# Altium PCB POWER_2layer.PcbDoc (part 1 of 2)
Units mm, origin at the board's own origin, x right, y up, seen from the top; angles counter-clockwise.
Board outline 130 x 60 mm, 2 copper layers (Top Layer, Bottom Layer), stack 1.571 mm thick; 93 components, 51 nets, 347 pads, 515 vias.
Unrouted connection lines stored in the file: 102.
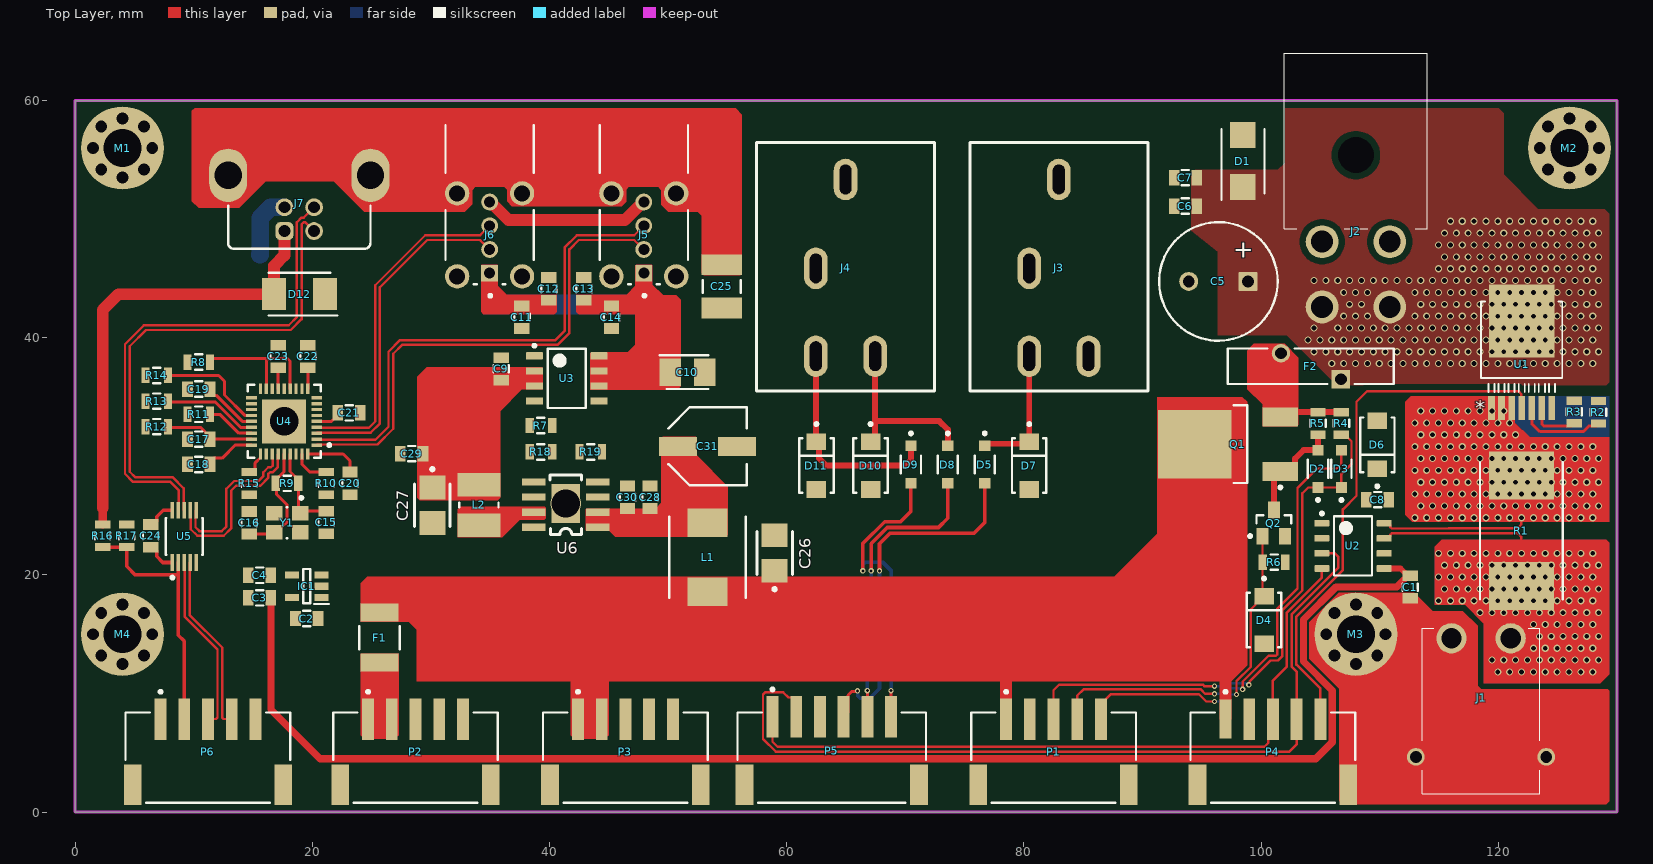
[diagram p0: Top Layer view]
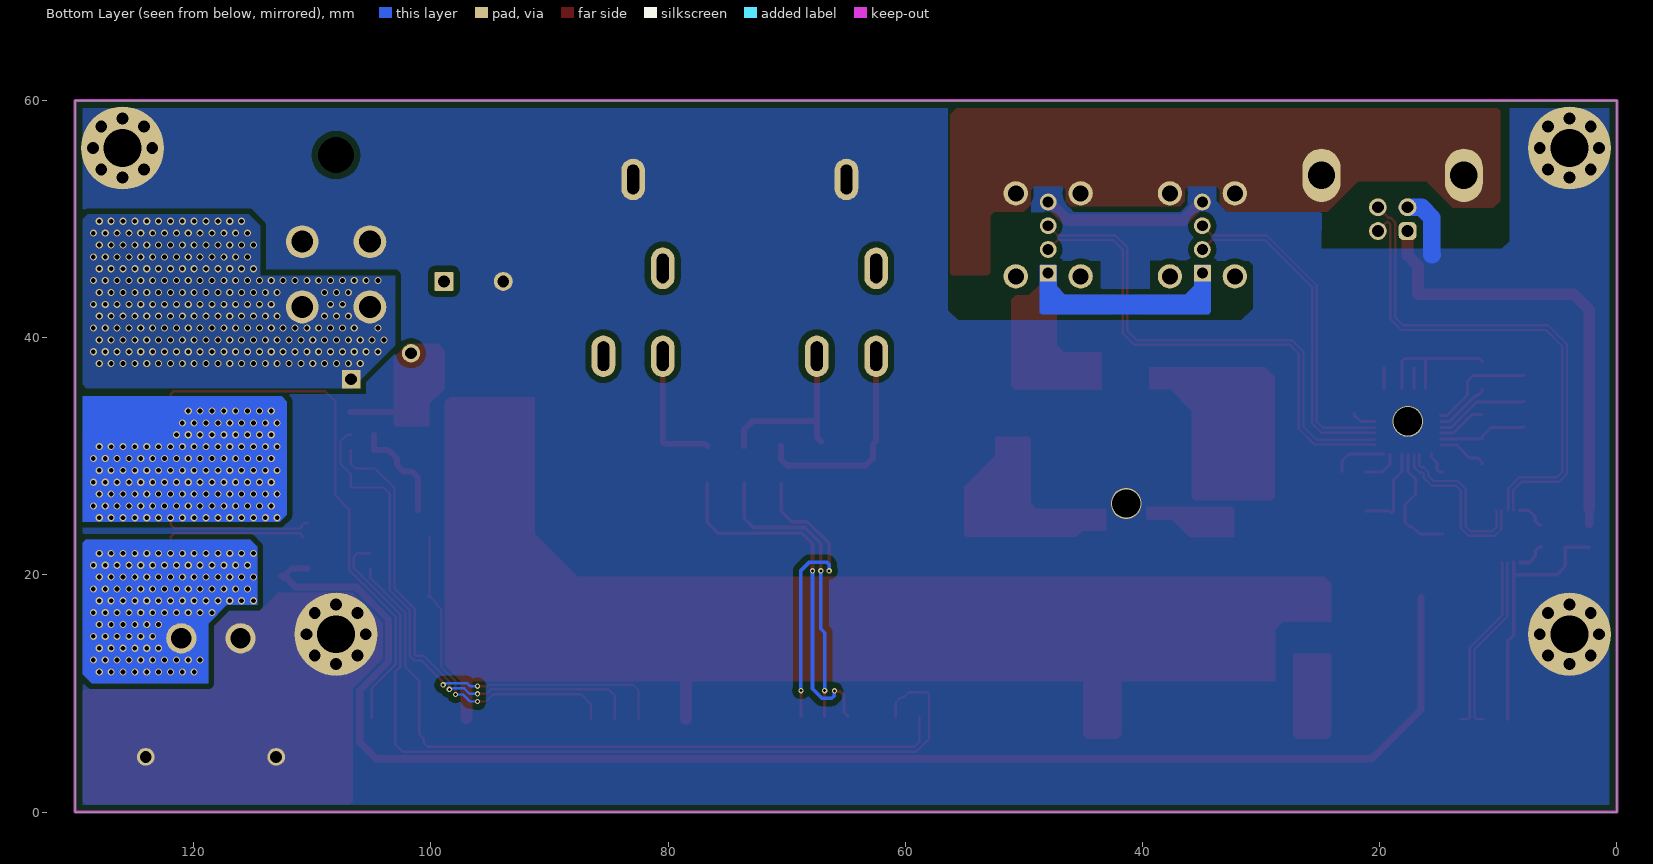
[diagram p1: Bottom Layer view, seen from below]
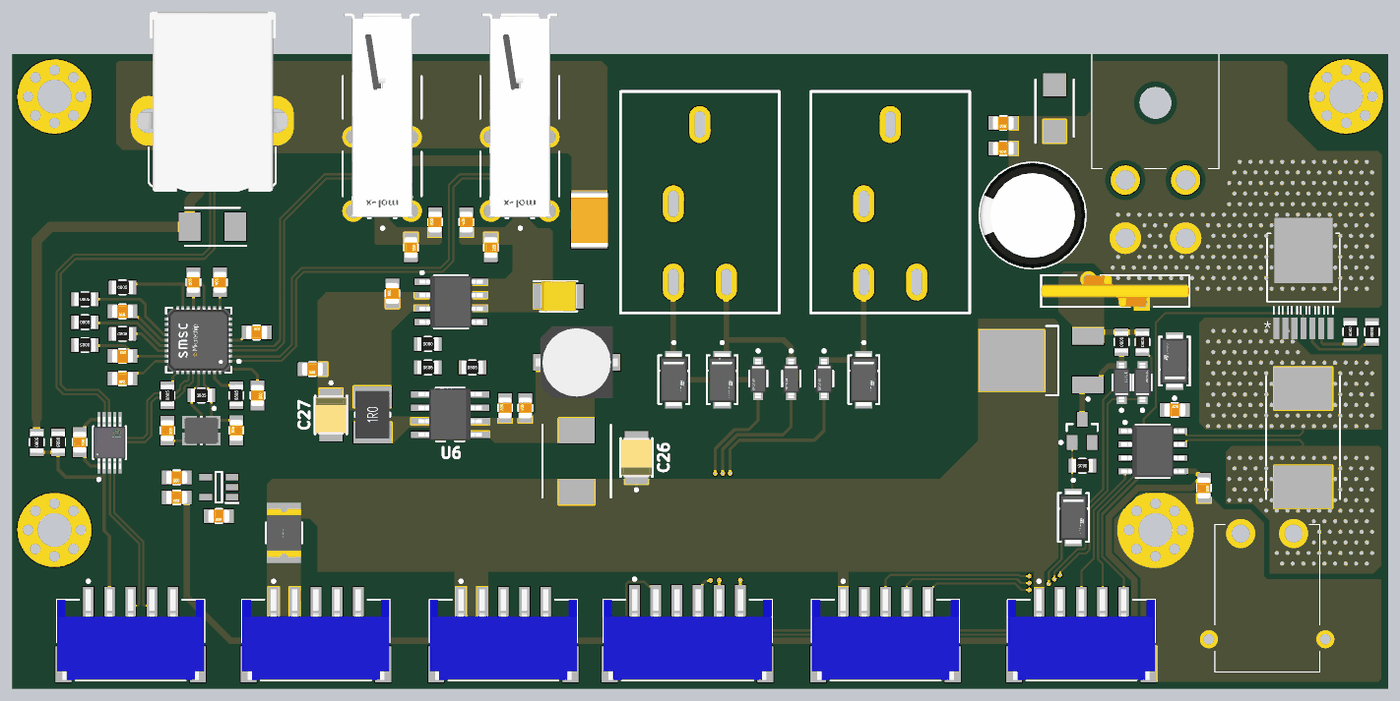
[diagram p2: 3D render of the assembled board from above, using the file's embedded part models]

## Layer stack, top to bottom
Top Solder: solder mask 0.0102, Solder Resist, Dk 3.5
Top Layer: signal copper 0.0356
Dielectric 1: dielectric 1.5, FR-4, Dk 4.8
Bottom Layer: signal copper 0.0356
Bottom Solder: solder mask 0.0102, Solder Resist, Dk 3.5

## Board outline
0,0 0,60 130,60 130,0

## Design rules (kind name [scope] priority, off if disabled: settings)
Clearance Clearance_Poly [InPoly] p1: gap=0.5 ignorepadtopadclearanceinfootprint=FALSE
Clearance [All] p2: gap=0.2 ignorepadtopadclearanceinfootprint=FALSE
DiffPairsRouting [All] p1: maxlimit=0.254 minlimit=0.2 mostfreqgap=0.2 toplayer_minwidth=0.2 toplayer_maxwidth=0.2 toplayer_prefwidth=0.2 bottomlayer_minwidth=0.2 bottomlayer_maxwidth=0.2 bottomlayer_prefwidth=0.2 maxuncoupledlength=12.7
HoleSize [All] p1: absolutevalues=TRUE maxlimit=10 minlimit=0.025 maxpercent=80.000 minpercent=20.000
PolygonConnect [All] p1: connectstyle=Direct reliefconductorwidth=0.254 reliefentries=4 polygonreliefangle="90 Angle" airgapwidth=0.254
RoutingVias [All] p1: holewidth=0.711 width=1.27 viastyle="Through Hole" minholewidth=0.25 minwidth=0.45 maxholewidth=0.711 maxwidth=1.27
SolderMaskExpansion [All] p1: expansion=0.102 istentingtop=FALSE
Width [All] p1: maxlimit=5 minlimit=0.2 preferedwidth=0.2
28 further rules are at their usual default settings.

## Classes and differential pairs
component class USB: C9 C10 C11 C12 C13 C14 C15 C16 C17 C26 C27 C28 C29 C30 C31 D12 J5 J6 J7 L1 L2 P6 R7 R8 R9 R10 R11 R12 R13 R14 R15 R16 R17 R18 R19 U3 U4 U5 U6 Y1
component class POWER: C1 C2 C3 C4 C5 C6 C7 C8 D1 D2 D3 D4 D5 D6 D7 D8 D9 D10 D11 F1 F2 IC1 J1 J2 J3 J4 M1 M2 M3 M4 P1 P2 P3 P4 P5 Q1 Q2 R1 R2 R3 R4 R5 R6 U1 U2
differential pair USB: +USB_P -USB_N
differential pair USBH: +USBH_P -USBH_N
differential pair USBH2: +USBH2_P -USBH2_N
differential pair USBH1: +USBH1_P -USBH1_N
differential pair USBD: +USBD_P -USBD_N
differential pair PA_CUR: +PA_CUR_P -PA_CUR_N

## Components (designator, comment, footprint, x,y, rotation, side; value= is the part's Value field where it differs from the comment)
C1 "100nF" C-0805 112.575,18.975 r270 top
C2 "100nF" C-0805 19.525,16.325 r180 top
C3 "10uF" C-0805 15.55,18.075 r180 top
C4 "100nF" C-0805 15.55,19.975 r180 top
C5 "330uF" "CE 5.0-10x12.5" 96.4,44.75 r180 top
C6 "100nF" C-0805 93.625,51.1 r180 top
C7 "10nF" C-0805 93.625,53.5 r180 top
C8 "8.2n" C-0805 109.825,26.35 r0 top
C9 "10uF" C-0805 35.925,37.375 r90 top
C10 "TAJB107K006RNJ" CAPPM3528X210N 51.625,37.1 r0 top
C11 "10uF" C-0805 37.675,41.725 r270 top
C12 "10uF" C-0805 39.95,44.125 r90 top
C13 "10uF" C-0805 42.9,44.125 r90 top
C14 "10uF" C-0805 45.225,41.725 r270 top
C15 "18pF NP0" C-0805 21.175,24.425 r90 top
C16 "18pF NP0" C-0805 14.675,24.4 r270 top
C17 "100n" C-0805 10.425,31.45 r0 top
C18 "100nF" C-0805 10.425,29.325 r180 top
C19 "100nF" C-0805 10.425,35.675 r180 top
C20 "100nF" C-0805 23.175,27.725 r270 top
C21 "100nF" C-0805 23.1,33.675 r0 top
C22 "100nF" C-0805 19.625,38.425 r90 top
C23 "100nF" C-0805 17.125,38.425 r90 top
C24 "100n" C-0805 6.375,23.3 r270 top
C25 "1812B103K202CT" CAPC4632X280X75LL50T35 54.525,44.325 r270 top
C26 "10uF 20V" CAPAE_4.3X4.3H5.4 58.975,21.45 r90 top
C27 "22uF 10V" CAPAE_4.3X4.3H5.4 30.125,26.275 r270 top
C28 "100nF" C-0805 48.475,26.55 r90 top
C29 "100nF" C-0805 28.375,30.225 r180 top
C30 "100nF" C-0805 46.575,26.55 r90 top
C31 "EEE1EA220SP" EEE1AA101SP 53.325,30.85 r0 top
D1 "SM6T15A-E3_52" DIOM5436X244N 98.475,54.9 r90 top
D2 "1N4148W-13-F" FP-SOD123-MFG 104.8,28.95 r90 top value=2pF
D3 "1N4148W-13-F" FP-SOD123-MFG 106.775,28.95 r90 top value=2pF
D4 "SMAJ5.0A-TR" FP-SMA-MFG 100.25,16.2 r270 top
D5 "1N4148W-13-F" FP-SOD123-MFG 76.7,29.313 r270 top value=2pF
D6 "SMAJ5.0A-TR" FP-SMA-MFG 109.8,30.975 r90 top
D7 "SMAJ5.0A-TR" FP-SMA-MFG 80.45,29.221 r270 top
D8 "1N4148W-13-F" FP-SOD123-MFG 73.587,29.313 r270 top value=2pF
D9 "1N4148W-13-F" FP-SOD123-MFG 70.475,29.313 r270 top value=2pF
D10 "SMAJ5.0A-TR" FP-SMA-MFG 67.074,29.221 r270 top
D11 "SMAJ5.0A-TR" FP-SMA-MFG 62.502,29.221 r270 top
D12 "SK14B" DIOM5236X261N 18.925,43.675 r180 top
F1 "MF-MSMF110/16-2" FP-MF-MSMF110-16-MFG 25.675,14.725 r270 top value=0.04-0.21Ω
F2 "RUEF400" FP-RUEF400-MFG 104.2,37.6 r180 top value=0.01-0.05Ω
IC1 "TPS70933DBVR" SOT95P280X145-5N 19.525,19.05 r180 top
J1 "XT30PW-M" XT30PWM 118.55,8.75 r180 top
J2 "76825-0004" 768250004 108,53.3 r180 top locked
J3 "PJ-603A" PJ-603A 82.95,45.9 r0 top locked
J4 "PJ-603A" PJ-603A 64.96,45.9 r0 top locked
J5 "48204-0001" FP-48204-0001-MFG 47.95,54.25 r180 top locked
J6 "48204-0001" FP-48204-0001-MFG 34.95,54.25 r180 top locked
J7 "USB B-PCB-R" USB_B_PCB_R 18.9,51.35 r180 top
L1 "IHLP2525CZER100M01" INDPM6965X300N 53.325,21.5 r90 top
L2 "744045003" WE-LQ-L 34.05,25.9 r90 top
M1 "MountHole" MOUNTHOLE 4,56 r90 top locked
M2 "MountHole" MOUNTHOLE 126,56 r90 top locked
M3 "MountHole" MOUNTHOLE 108,15 r90 top
M4 "MountHole" MOUNTHOLE 4,15 r90 top locked
P1 "S5B-PH-SM4-TB(LF)(SN)" JST-S5B-PH-SM4-TB_V#1 82.5,5.175 r0 top
P2 "S5B-PH-SM4-TB(LF)(SN)" JST-S5B-PH-SM4-TB_V#1 28.7,5.175 r0 top
P3 "S5B-PH-SM4-TB(LF)(SN)" JST-S5B-PH-SM4-TB_V#1 46.4,5.175 r0 top
P4 "S5B-PH-SM4-TB(LF)(SN)" JST-S5B-PH-SM4-TB_V#2 101,5.175 r0 top
P5 "S6B-PH-SM4-TB(LF)(SN)" JST-S6B-PH-SM4-TB(LF)(SN)_V 63.8,5.175 r0 top
P6 "S5B-PH-SM4-TB(LF)(SN)" JST-S5B-PH-SM4-TB_V#1 11.2,5.175 r0 top
Q1 "IRFR9024NPBF" ONSC-DPAK-3-369C-01_V 97.225,31.025 r180 top
Q2 "BSS123" FAIR-SOT23-3_V 101.075,24.375 r0 top
R1 "WSR22L000FEB" RESM11670X254N 121.95,23.725 r270 top
R2 "1k" R-0805 128.45,33.725 r270 top
R3 "15k" R-0805 126.4,33.75 r270 top
R4 "30k" R-0805 106.775,32.775 r90 top
R5 "30k" R-0805 104.8,32.775 r90 top
R6 "30k" R-0805 101.1,21.075 r180 top
R7 "10k" R-0805 39.275,32.6 r180 top
R8 "10k" R-0805 10.425,37.95 r0 top
R9 "1M" R-0805 17.875,27.725 r0 top
R10 "2k" R-0805 21.175,27.725 r90 top
R11 "2k" R-0805 10.425,33.55 r0 top
R12 "2k" R-0805 6.875,32.5 r180 top
R13 "2k" R-0805 6.875,34.65 r0 top
R14 "2k" R-0805 6.875,36.825 r0 top
R15 "2k" R-0805 14.675,27.725 r90 top
R16 "2k" R-0805 2.325,23.3 r90 top
R17 "2k" R-0805 4.35,23.3 r270 top
R18 "39k" R-0805 39.275,30.375 r0 top
R19 "7.5k" R-0805 43.475,30.375 r0 top
U1 "VN7004CLH" OCTAPAK7_6P1X6P5_STM-M 121.975,39.825 r0 top
U2 "INA219AIDR" D0008A_L 107.75,22.45 r0 top
U3 "TPS2034D" D0008A_N 41.45,36.575 r0 top
U4 "USB2512BI-AEZG" FP-USB2512BI-AEZG-MFG 17.625,32.95 r180 top
U5 "FSUSB42MUX" FP-846AP-MFG 9.2,23.25 r90 top
U6 "ST1S10" ST1S10 41.375,25.925 r180 top
Y1 "NX1612SA-24MHZ-STD-CIS-1" FP-NX3225GA-MFG 17.875,24.4 r180 top

## Footprints (in the part's own frame and the unit in brackets; to place one, negate y for a bottom-side part, rotate by r counter-clockwise, add the part's x,y. Pads: shape width x height; smd on the part's side, far side on the other; paste and mask are expansions set on the pad)
768250004 [mm]
  round 2.775 hole 1.85: 1(-2.85,10.7) 2(2.85,10.7) 3(-2.85,5.2) 4(2.85,5.2)
  round 1.525 hole 3.05 unplated: 5(0,-2.1)
  silkscreen extent -6,-10.7 6.02,4.1, body extent -5.99,-10.59 6.07,11.37, height 14.51
C-0805 [mm] "Surface-Mount Multilayer Chip Capacitor, Body 2 x 1.25 mm (L x W)"
  rect 0.9x1.3 smd: 1(-0.95,0) 2(0.95,0)
  Top Layer pour cut-out: -0.5,0.65 0.5,0.65 0.5,-0.65 -0.5,-0.65
  silkscreen extent -0.3,-0.65 0.3,0.65, body extent -1,-0.62 1,0.63, height 0.78
CAPAE_4.3X4.3H5.4 [mm]
  rect 2x2.2 smd: 1(-1.1,0) 2(1.9,0)
  silkscreen extent -2.9,-1.5 2.2,1.5, body extent -1.45,-1.5 2.25,1.5, height 2.16
CAPC4632X280X75LL50T35 [mm] "Chip Capacitor, 2-Leads, Body 5.1x3.5mm, IPC High Density"
  rect 1.75x3.4 smd: 1(-1.825,0) 2(1.825,0)
  silkscreen extent -0.55,-1.6 0.55,1.6, body extent -2.55,-1.75 2.55,1.75, height 2.8
CAPPM3528X210N [mm]
  rect 1.8x2.3 smd: 1(-1.45,0) 2(1.45,0)
  silkscreen extent -2.35,-1.43 1.75,1.43, body extent -1.75,-1.43 1.75,1.43, height 2.1
"CE 5.0-10x12.5" [mm] "Capacitor, Electrolytic, Radial; RM 5mm; Body 10x12.5mm"
  rrect10% 1.6x1.6 hole 1: 1(-2.5,0)
  round 1.6 hole 1: 2(2.5,0)
  silkscreen extent -5,-5 5,5, body extent -5,-5 4.97,5, height 12.51
D0008A_L [mm] "SOIC, 8-Leads, Body 5x4mm, Pitch 1.27mm, IPC High Density"
  rrect18% 1.25x0.55 smd: 1(-2.625,1.905) 2(-2.625,0.635) 3(-2.625,-0.635) 4(-2.625,-1.905) 5(2.625,-1.905) 6(2.625,-0.635) 7(2.625,0.635) 8(2.625,1.905)
  silkscreen extent -2.75,-2.5 1.6,2.85, body extent -3,-2.45 3,2.45, height 1.63
D0008A_N [mm] "SOIC, 8-Leads, Body 5x4mm, Pitch 1.27mm, IPC Medium Density"
  rrect17% 1.45x0.6 smd: 1(-2.725,1.905) 2(-2.725,0.635) 3(-2.725,-0.635) 4(-2.725,-1.905) 5(2.725,-1.905) 6(2.725,-0.635) 7(2.725,0.635) 8(2.725,1.905)
  silkscreen extent -2.85,-2.5 1.6,2.88, body extent -3,-2.45 3,2.45, height 1.63
DIOM5236X261N [mm]
  rect 2.05x2.7 smd: 1(-2.15,0) 2(2.15,0)
  silkscreen extent -3.18,-1.8 2.59,1.8, body extent -2.59,-1.8 2.59,1.8, height 2.61
DIOM5436X244N [mm]
  rect 2.2x2.15 smd: 1(-2.2,0) 2(2.2,0)
  silkscreen extent -3.27,-1.81 2.7,1.81, body extent -2.7,-1.81 2.7,1.81, height 2.44
EEE1AA101SP [mm]
  rect 3.2x1.6 smd: 1(-2.5,0) 2(2.5,0)
  silkscreen extent -3.3,-3.3 3.3,3.3, body extent -3.9,-3.4 3.9,3.4, height 5.57
FAIR-SOT23-3_V [mm] "SOT23, 3-Leads, Body 2.92x1.3mm, Pitch 0.95mm"
  rect 1x1.4 smd: 1(-0.95,-1.1) 2(0.95,-1.1) 3(0,1.1)
  silkscreen extent -2.12,-1.22 1.46,0.65, body extent -1.46,-0.65 1.46,0.65, height 1.2
FP-846AP-MFG [mm]
  rect 1.4x0.3 smd paste+0 mask+0: 1(-2.2,1) 2(-2.2,0.5) 3(-2.2,0) 4(-2.2,-0.5) 5(-2.2,-1) 6(2.2,-1) 7(2.2,-0.5) 8(2.2,0) 9(2.2,0.5) 10(2.2,1)
  silkscreen extent -3.6,-1.55 1.55,1.55, body extent -3,-1.65 3,1.65, height 0.25
FP-48204-0001-MFG [mm]
  rect 1.42x1.42 hole 0.92 paste-1000 mask+0: 1(0,8.805)
  round 1.42 hole 0.92 paste-1000 mask+0: 2(0,6.805) 3(0,4.805) 4(0,2.805)
  round 2.05 hole 1.35 paste-1000 mask+0: 5(-2.735,9.075) 6(2.735,9.075) 7(-2.735,2.075) 8(2.735,2.075)
  silkscreen extent -3.72,-3.67 3.72,10.83, body extent -3.86,-9.85 3.86,10.2, height 0.25
FP-MF-MSMF110-16-MFG [mm]
  rect 1.5x3.2 smd paste+0 mask+0: 1(-2.1,0) 2(2.1,0)
  silkscreen extent -0.97,-1.71 0.97,1.71, body extent -2.95,-1.81 2.95,1.81, height 0.25
FP-NX3225GA-MFG [mm]
  rect 1.4x1.2 smd paste+0 mask+0: 1(-1.1,-0.8) 2(1.1,-0.8) 3(1.1,0.8) 4(-1.1,0.8)
  silkscreen extent -1.33,-2.22 0.03,1.3, body extent -1.9,-1.5 1.9,1.5, height 0.25
FP-RUEF400-MFG [mm]
  rect 1.55x1.55 hole 1 paste-1000 mask+0: 1(-2.525,1.095)
  round 1.55 hole 1 paste-1000 mask+0: 2(2.525,-1.095)
  silkscreen extent -7,-1.5 7,1.5, body extent -7.1,-1.97 7.1,1.97, height 0.25
FP-SMA-MFG [mm]
  rect 1.4x1.64 smd paste+0 mask+0: 1(-2.015,0) 2(2.015,0)
  silkscreen extent -3.62,-1.45 2.3,1.45, body extent -2.82,-1.55 2.82,1.55, height 0.25
FP-SOD123-MFG [mm]
  rect 0.9x0.95 smd paste+0 mask+0: 1(-1.575,0) 2(1.575,0)
  silkscreen extent -2.75,-0.85 0.75,0.85, body extent -2.12,-0.95 2.12,0.95, height 0.25
FP-USB2512BI-AEZG-MFG [mm]
  rect 0.9x0.28 smd paste+0 mask+0: 1(-2.75,2) 2(-2.75,1.5) 3(-2.75,1) 4(-2.75,0.5) 5(-2.75,0) 6(-2.75,-0.5) 7(-2.75,-1) 8(-2.75,-1.5) 9(-2.75,-2) 19(2.75,-2) 20(2.75,-1.5) 21(2.75,-1) 22(2.75,-0.5) 23(2.75,0) 24(2.75,0.5) 25(2.75,1) 26(2.75,1.5) 27(2.75,2)
  rect 0.28x0.9 smd paste+0 mask+0: 10(-2,-2.75) 11(-1.5,-2.75) 12(-1,-2.75) 13(-0.5,-2.75) 14(0,-2.75) 15(0.5,-2.75) 16(1,-2.75) 17(1.5,-2.75) 18(2,-2.75) 28(2,2.75) 29(1.5,2.75) 30(1,2.75) 31(0.5,2.75) 32(0,2.75) 33(-0.5,2.75) 34(-1,2.75) 35(-1.5,2.75) 36(-2,2.75)
  rect 3.7x3.7 smd paste+0 mask+0: 37(0,0)
  silkscreen extent -3.93,-3.08 3.08,3.08, body extent -3.3,-3.3 3.3,3.3, height 0.25
INDPM6965X300N [mm]
  rect 2.4x3.4 smd: 1(-2.9,0) 2(2.9,0)
  silkscreen extent -3.43,-3.23 3.43,3.23, body extent -3.54,-3.33 3.53,3.34, height 2.89
JST-S5B-PH-SM4-TB_V#1 [mm] "SMD, 7-Leads, Body 13.9x7.6mm, Pitch 2mm"
  rect 1x3.5 smd: 1(-4,2.675) 2(-2,2.675) 3(0,2.675) 4(2,2.675) 5(4,2.675)
  rect 1.5x3.4 smd: MP1(-6.35,-2.875) MP2(6.35,-2.875)
  silkscreen extent -6.95,-4.38 6.95,5.1, body extent -6.95,-4.37 6.95,4.23, height 5.6
JST-S5B-PH-SM4-TB_V#2 [mm] "SMD, 7-Leads, Body 13.9x7.6mm, Pitch 2mm"
  rect 1x3.3 smd: 1(-4,2.675)
  rect 1x3.5 smd: 2(-2,2.675) 3(0,2.675) 4(2,2.675) 5(4,2.675)
  rect 1.5x3.4 smd: MP1(-6.35,-2.875) MP2(6.35,-2.875)
  silkscreen extent -6.95,-4.38 6.95,5.1, body extent -6.95,-4.37 6.95,4.23, height 5.6
JST-S6B-PH-SM4-TB(LF)(SN)_V [mm] "SMD, 2-Leads, Body 15.9x7.6mm, Pitch 2mm"
  rect 1x3.5 smd: 1(-5,2.875) 2(-3,2.875) 3(-1,2.875) 4(1,2.875) 5(3,2.875) 6(5,2.875)
  rect 1.5x3.4 smd: MP1(-7.35,-2.875) MP2(7.35,-2.875)
  silkscreen extent -7.95,-4.37 7.95,5.3, body extent -7.95,-4.37 7.95,4.23, height 5.6
MOUNTHOLE [mm]
  round 0.8 hole 1: 1(-2.5,0) 1(-1.8,-1.8) 1(-1.8,1.8) 1(0,2.5) 1(0,-2.5) 1(1.8,-1.8) 1(1.8,1.8) 1(2.5,0)
  round 7 hole 3.2: 1(0,0)
OCTAPAK7_6P1X6P5_STM-M [mil]
  rect 22x79 smd paste+0 mask+0: 1(-100.39,-226.5) 2(-66.93,-226.5) 3(-33.46,-226.5) 4(0,-226.5) 5(33.46,-226.5) 6(66.93,-226.5) 7(100.39,-226.5)
  rect 217x243 smd paste+0 mask+0: 8(0,63)
  silkscreen extent -135,-173 135,127, body extent -130,-244 130,154, height 95
ONSC-DPAK-3-369C-01_V [mm] "DPAK, 3-Leads, Body 6.54x6.095mm, Pitch 2.29mm"
  rect 3x1.6 smd: 1(-4.4,2.29) 3(-4.4,-2.29)
  rect 6.2x5.8 smd: 4(2.8,0)
  silkscreen extent -4.53,-3.27 -0.45,3.76, body extent -1.6,-3.27 4.49,3.27, height 2.38
PJ-603A [mm]
  oval 2x3.5 hole 1 slot 2.5 at 90 deg: 2(0,7.45) 3(-2.5,-0.05) 4(-2.5,-7.45) 5(2.5,-7.45)
  silkscreen extent -7.5,-10.38 7.5,10.58
R-0805 [mm] "Thin Film, Rectangular Resisitor Chip, Body 2 x 1.2 mm (L x W)"
  rect 0.7x1.3 smd: 1(-0.95,0) 2(0.95,0)
  Top Layer pour cut-out: -0.6,0.65 0.6,0.65 0.6,-0.65 -0.6,-0.65
  silkscreen extent -0.3,-0.65 0.3,0.65, body extent -1,-0.62 1,0.62, height 0.6
RESM11670X254N [mm]
  rect 4.05x5.5 smd: 1(-4.65,0) 2(4.65,0)
  silkscreen extent -5.78,-3.49 5.78,3.49, body extent -5.78,-3.49 5.78,3.49, height 2.41
SOT95P280X145-5N [mm]
  rect 1.2x0.6 smd: 1(-1.25,0.95) 2(-1.25,0) 3(-1.25,-0.95) 4(1.25,-0.95) 5(1.25,0.95)
  silkscreen extent -1.85,-1.45 0.3,1.5, body extent -1.4,-1.45 1.4,1.45, height 1.2
ST1S10 [mm]
  rect 2x0.6 smd: 1(-2.7,1.905) 2(-2.7,0.635) 3(-2.7,-0.635) 4(-2.7,-1.905) 5(2.7,-1.905) 6(2.7,-0.635) 7(2.7,0.635) 8(2.7,1.905)
  rect 2.41x3.3 smd: 9(0,-0.1)
  silkscreen extent -1.32,-2.5 1.32,2.5, body extent -3,-2.45 3,2.45, height 1.63
USB_B_PCB_R [mm] "USB B-type connector"
  rrect50% 1.5x1.5 hole 1: 1(1.25,2.35)
  round 1.5 hole 1: 2(-1.25,2.35) 3(-1.25,0.35) 4(1.25,0.35)
  oval 3.2x4.5 hole 2.3: 5(6,-2.35) 6(-6,-2.35)
  silkscreen extent -6,0.19 6,3.85, body extent -7.49,-12.65 7.39,4.35, height 11
WE-LQ-L [mm] "Inductor, 2-Leads, Body 4.5 x 3.2 mm"
  rect 2x3.6 smd: 1(-1.7,0) 2(1.7,0)
  silkscreen extent -0.2,-1.65 0.2,1.65, body extent -2.25,-1.6 2.25,1.6, height 2.59
XT30PWM [mm]
  round 2.55 hole 1.7: 1(-2.5,-5.912) 2(2.5,-5.912)
  round 1.5 hole 1: 3(5.5,4.088) 4(-5.5,4.088)
  silkscreen extent -4.95,-6.76 4.95,7.19, body extent -6.65,-6.71 6.65,7.24, height 5.06

## Part data
C1 C2 C3 C4 C6 C7 C8 C9 C11 C12 C13 C14 C15 C16 C17 C18 C19 C20 C21 C22 C23 C24 C28 C29 C30: library part "C semi", "Ceramic Multilayer Capacitor", Manufacturer=Yageo/Phycomp, Manufacturer P/N=CC0603JRNPO9BN102, Tolerance=±10%, numsch=011, Parameters="1nF, NP0, 50V, ±5%", TypeNum=155
C5: library part CE, "Capacitor Electrolytic", Manufacturer=Yageo/Phycomp, Manufacturer P/N="SK 016 M 470", Tolerance=±20%, numsch=019, Parameters="470uF, SK, 16V, ±20%", TypeNum=185
C10: "Capacitor Polarised", Manufacturer_Name=AVX, Mouser Part Number=581-TAJB107K006R, Arrow Part Number=TAJB107K006RNJ, Arrow Price/Stock=https://www.arrow.com/en/products/tajb107k006rnj/avx?region=nac, Datasheet Link=http://datasheets.avx.com/TAJ.pdf, Height=2.1mm, Manufacturer_Part_Number=TAJB107K006RNJ, Mouser Price/Stock=https://www.mouser.co.uk/ProductDetail/AVX/TAJB107K006RNJ?qs=fdqkYiOtZpcsxthKdBMg8Q%3D%3D
C25: library part CMP-2000-05506-1, "X7R ±10% 2kV 10nF 1812 Multilayer Ceramic Capacitors MLCC - SMD/SMT ROHS", Capacitance=10nF, Case Size/Dimension=1812, Dielectric=X7R, Manufacturer=AVX, Package Description="2-Pin Surface Mount Device, Body 4.6 x 3.2 mm", Rated Voltage=1000V, Tolerance (%)=±10%, Datasheet URL=http://datasheets.avx.com/HV-FlexitermMLCC.pdf, Datasheet Version=01/2016, Manufacturer URL=http://www.avx.com/, Mounting Technology=SurfaceMount, Package Reference=1812
C26 C27: library part CAPAE_4.3x4.3h5.4, "CAPAE_4.3x4.3h5.4"
C31: "Capacitor Polarised", Manufacturer_Name=Panasonic, Datasheet Link=http://industrial.panasonic.com/cdbs/www-data/pdf/RDE0000/ABA0000C1145.pdf, Height=7.8mm, Manufacturer_Part_Number=EEE1EA220SP
D1: "TVS Diode (Uni-directional)", Arrow Part Number=SM6T15A-E3/52, Manufacturer_Name=Vishay, Mouser Part Number=625-SM6T15A-E3, Arrow Price/Stock=https://www.arrow.com/en/products/sm6t15a-e352/vishay?region=nac, Datasheet Link=https://www.vishay.com/docs/88385/sm6t.pdf, Height=2.44mm, Manufacturer_Part_Number=SM6T15A-E3/52, Mouser Price/Stock=https://www.mouser.co.uk/ProductDetail/Vishay-General-Semiconductor/SM6T15A-E3-52?qs=nmw3K3MsCZZRtlXmnTWYow%3D%3D
D2 D3 D5 D8 D9: library part CMP-12791-000005-1, "DIODE GEN PURP 100V 150MA SOD123", Capacitance=2pF, Forward Current=300mA, Manufacturer="Diodes Inc.", Max Junction Temp=+150°C, Max Repetitive Reverse Voltage=100V, Max Surge Forward Current=1A, Package=SOD123, Peak Reverse Current=1uA, Temperature="-65°C to +150°C", Temperature Range Low=-65°C, Automotive=No, Category=Diode, ComponentLink2Description=Datasheet, ComponentLink2URL=https://upverter.com/datasheet/628e7d6fee5901eee6eef4567d1c3569f2cd3cde.pdf, Device Class L1="Discrete Semiconductors", Device Class L2=Diodes, Device Class L3="Rectifier Diodes", Digikey Description="DIODE GEN PURP 100V 150MA SOD123", Footprint Url=https://www.diodes.com/assets/Package-Files/SOD123.pdf, Height=1.45mm, Lead Free=Yes, Manufacturer Part Number=1N4148W-13-F, Mouser Description="1N4148W Series 2 A 100 V 400 mW Surface Mount Fast Switching Diode - SOD-123", Octopart=https://octopart.com/1n4148w-13-f-diodes+inc.-2359612, Reverse Voltage=100V, RoHS=TRUE, Standoff Height=0mm, Temperature Range High=+150°C
D4 D6 D7 D10 D11: library part CMP-12225-000048-1, "TVS DIODE 5V 13.4V SMA", Breakdown Voltage=6.4V, Clamping Voltage=9.2V, Manufacturer=STMicroelectronics, Max Junction Temp=+150°C, Package=SMA, Peak Pulse Current=43.5A, Peak Pulse Power=400W, Reverse Standoff Voltage=5V, Temperature="-55°C to +150°C", Temperature Range Low=-55°C, Automotive=No, Category=Diode, ComponentLink2Description=Datasheet, ComponentLink2URL=https://www.st.com/resource/en/datasheet/smaj.pdf, Device Class L1="Circuit Protection", Device Class L2="TVS Diodes", Device Class L3=unset, Digikey Description="TVS DIODE 5V 13.4V SMA", Direction=Unidirectional, Height=2.65mm, Lead Free=Yes, Manufacturer Part Number=SMAJ5.0A-TR, Mouser Description="Transient Voltage Suppressor, TVS, Transil SMAJ Series, Unidirectional, 5 V, DO-214AC, 2, 6.4 V", Number Of Channels=1, Octopart=https://octopart.com/smaj5.0a-tr-stmicroelectronics-347063, RoHS=TRUE, Standoff Height=0.05mm, Temperature Range High=+150°C
D12: "Schottky Diode", Manufacturer_Name="Taiwan Semiconductor", Mouser Part Number=821-SK14B, Datasheet Link=https://datasheet.datasheetarchive.com/originals/distributors/Datasheets-35/DSA-697770.pdf, Height=2.61mm, Manufacturer_Part_Number=SK14B, Mouser Price/Stock=https://www.mouser.co.uk/ProductDetail/Taiwan-Semiconductor/SK14B?qs=tHU%2FlV7kTyTJWY0R1AZI9A%3D%3D
F1: library part CMP-07400-000018-1, "PTC RESET FUSE 16V 1.1A 1812", Ambient Temperature Range High=+85°C, Ambient Temperature Range Low=-40°C, Current Rating=100A, Hold Current=1.1A, Manufacturer=Bourns, Package=MF-MSMF110/16, Resistance=0.04-0.21Ω, Temperature="-40°C to +85°C", Trip Current=2.2A, Voltage Rating=16V, Automotive=Yes, Automotive Grade="Grade 3", Category=Fuse, ComponentLink2Description=Datasheet, ComponentLink2URL=https://upverter.com/datasheet/72639194a1e73201de7e7957ee4193eb5a54a50e.pdf, Device Class L1="Circuit Protection", Device Class L2="PTC Resettable Fuses", Device Class L3=unset, Digikey Description="PTC RESET FUSE 16V 1.1A 1812", Height=0.85mm, Lead Free=Yes, Manufacturer Part Number=MF-MSMF110/16-2, Mouser Description="Resettable Fuses - PPTC 1.1A 16V 0.04ohm", Octopart=https://octopart.com/mf-msmf110%2F16-2-bourns-40767, RoHS=TRUE, Temperature Range High=+85°C, Temperature Range Low=-40°C, Trip Time=0.3s
F2: library part CMP-08606-000051-1, "PTC RESET FUSE 30V 4A RADIAL", Ambient Temperature Range High=+85°C, Ambient Temperature Range Low=-40°C, Current Rating=100A, Hold Current=4A, Manufacturer=Littelfuse, Resistance=0.01-0.05Ω, Temperature="-40°C to +85°C", Trip Current=8A, Voltage Rating=30V, Automotive=No, Category=Fuse, ComponentLink2Description=Datasheet, ComponentLink2URL=https://www.littelfuse.com/~/media/electronics/datasheets/resettable_ptcs/littelfuse_ptc_radial_leaded_ruef_datasheet.pdf.pdf, Device Class L1="Circuit Protection", Device Class L2="PTC Resettable Fuses", Device Class L3=unset, Digikey Description="PTC RESET FUSE 30V 4A RADIAL", Height=19.3mm, Lead Free=Yes, Manufacturer Part Number=RUEF400, Mouser Description="PTC Resettable Fuse 4A(hold) 8A(trip) 30V 100A 2.5W 12.7s 0.01Ohm Radial 14 X 3 X 19.3mm Bag", Octopart=https://octopart.com/ruef400-littelfuse-74215791, Package=RUEF400, RoHS=TRUE, Temperature Range High=+85°C, Temperature Range Low=-40°C, Trip Time=12.7s
IC1: "Integrated Circuit", Manufacturer_Name="Texas Instruments", Mouser Part Number=595-TPS70933DBVR, Arrow Part Number=TPS70933DBVR, Arrow Price/Stock=https://www.arrow.com/en/products/tps70933dbvr/texas-instruments?region=nac, Datasheet Link=http://www.ti.com/lit/gpn/tps709, Height=1.45mm, Manufacturer_Part_Number=TPS70933DBVR, Mouser Price/Stock=https://www.mouser.co.uk/ProductDetail/Texas-Instruments/TPS70933DBVR?qs=Z9twEOuL%252B%2FJOaGO60BtvLA%3D%3D
J1: "Connector", Manufacturer_Name=Amass, Datasheet Link=https://www.tme.eu/sl/Document/ce4077e36b79046da520ca73227e15de/XT30PW%20SPEC.pdf, Height=5mm, Manufacturer_Part_Number=XT30PW-M
J2: "Connector", Manufacturer_Name=Molex, Mouser2 Part Number=538-76825-0004, Datasheet Link=https://componentsearchengine.com//76825-0004.pdf, Height=16mm, Manufacturer_Part_Number=76825-0004, Mouser2 Price/Stock=https://www.mouser.com/Search/Refine.aspx?Keyword=538-76825-0004
J5 J6: library part CMP-0411-00001-3, "CONN RCPT USB2.0 TYPEA 4POS R/A", Color=Black, Current Rating=1.5A, Flammability Rating="UL94 V-0", Insulation Resistance=1GR, Max Operating Temperature=85°C, Max Voltage Rating (AC)=30V, Max Voltage Rating (DC)=3.03kV, Min Operating Temperature=-55°C, Package Quantity=60, Connector Type=USB, Contact Material=Tin, Contact Plating=Bronze, Depth=19.25mm, Features=Shielded, Gender=Female, Housing Material=Polyester, Length=7.2mm, Number of Circuits=4, Number of Contacts=4, Number of Ports=1, Number of Rows=3, Number of Terminals/Pins=4, Orientation="Right Angle", Packaging=Tray, Pitch=2mm, Radiation Hardening=No, Series=48204, Termination=Solder, Voltage Rating=30V, Voltage Rating (AC)=30V, Weight=0.09524oz
J7: library part "Conn USB 4P", "Connector USB B-PCB-90 deg", Manufacturer=SST, Manufacturer P/N=USB-001-B, TypeNum=820
L1: "Inductor", Manufacturer_Name=Vishay, Mouser Part Number=70-IHLP2525CZER100M0, Arrow Part Number=IHLP2525CZER100M01, Arrow Price/Stock=https://www.arrow.com/en/products/ihlp2525czer100m01/vishay?region=nac, Datasheet Link=https://www.vishay.com/docs/34104/ihlp-2525cz-01.pdf, Height=3mm, Manufacturer_Part_Number=IHLP2525CZER100M01, Mouser Price/Stock=https://www.mouser.co.uk/ProductDetail/Vishay-Dale/IHLP2525CZER100M01?qs=PA%252BPfIdQ8xl3JLrMc5InbA%3D%3D
L2: library part CMP-0227-00587-1, "SMD-RF-Inductor WE-LQ, L = 3.30 µH", Inductance="3.30 ÂµH", ComponentLink1Description="Manufacturer Link", ComponentLink1URL=http://www.we-online.com, ComponentLink2Description=Datasheet, ComponentLink2URL=http://www.we-online.de/katalog/media/pdf/744045003.pdf, DatasheetVersion="ver 3, Jul-2006", PackageDescription="Inductor, 2-Leads, Body 4.5 x 3.2 mm", PackageReference=WE-LQ-L, PackageVersion=2006
P1 P2 P3 P4 P6: library part CMP-2000-07026-1, "Male Header, Pitch 2 mm, 1 x 5 Position, Height 5.5 mm, -25 to 85 degC, RoHS, Tape and Reel", Manufacturer=JST, Package Description="Male Header, Pitch 2 mm, 1 x 5 Position, Height 5.5 mm", Package Reference=S5B-PH-SM4-TB, Datasheet URL=http://www.jst-mfg.com/product/pdf/eng/ePH.pdf, Datasheet Version=12/2012, Manufacturer URL=http://www.jst.com/home2.html, Mounting Technology=SurfaceMount, No of Positions=5, Pitch=2mm, Style/Orientation=RightAngleHeader/Plug, Termination=Crimp, Type=WiretoBoard
P5: library part CMP-2000-07027-1, "Male Header, Pitch 2 mm, 1 x 6 Position, Height 5.5 mm, -25 to 85 degC", Manufacturer=JST, Package Description="Male Header, Pitch 2 mm, 1 x 6 Position, Height 5.5 mm", Datasheet URL=https://datasheet.ciiva.com/11747/0900766b80df0d9d-11747278.pdf, Datasheet Version=11/2008, Manufacturer URL=http://www.jst.com/home2.html, Mounting Technology=SurfaceMount, No of Positions=6, Package Reference=S6B-PH-SM4-TB(LF)(SN), Pitch=2mm, Style/Orientation=RightAngleHeader/Plug, Termination=Solder, Type=ShroudedHeader
Q1: library part CMP-1058-00387-1, "IRFR9024NPBF, Транзистор, Р-канал 55В 11А", Manufacturer="On Semiconductor", Package Type="DPAK-3, IPAK-4", PartNumber=NTD2955G, Channel Polarity="P Channel", Ciss Typ (pF)=500, ComponentLink1Description="Manufacturer URL", ComponentLink1URL=http://www.onsemi.com/, ComponentLink2Description=Datasheet, ComponentLink2URL=http://www.onsemi.cn/pub_link/Collateral/NTD2955-D.PDF, ComponentLink3Description="Package Specification", ComponentLink3URL=http://www.onsemi.cn/pub_link/Collateral/369C.PDF, Configuration=Single, Coss Typ (pF)=150, Crss Typ (pF)=50, DatasheetVersion="Rev. 13", ID Max (A)=12, Mounting Technology="Surface Mount", PackageDescription="3-Pin Flange Mount, Body 6.54 x 6.095 mm, Pitch 2.29 mm", PackageReference=DPAK-3-369C-01, PackageVersion="Rev. E, 02/2014", Packing="Tape and Reel", PD Max (W)=55, Qrr Typ (nC)=100, RoHS=Pb-Free, V(BR)DSS Min (V)=60, VGS Max (V)=20, VGS(th) Max (V)=4
Q2: library part CMP-2000-04934-1, "N-Channel Logic Level Enhancement Mode Field Effect Transistor, 1.7 V, -55 to 150 degC, 3-Pin SOT-23, RoHS, Tape and Reel", Manufacturer=Fairchild, Maximum Continuous Drain Current=0.17A, Maximum Drain Source Voltage=100V, Maximum Gate Source Voltage=±20V, Operating Temperature=-55to150degC, Package=3SOT-23, Package Description="3-Pin Small Outline Transistor, Body 2.92 x 1.325 mm, Pitch 0.95 mm", Package Reference=SOT23-3, Package Version="Rev. 12, 03/2016", Category=MOSFET, Channel Mode=Enhancement, Channel Type=N, Datasheet URL=https://www.fairchildsemi.com/datasheets/BS/BSS123.pdf, Datasheet Version=Jun-03, Manufacturer URL=https://www.fairchildsemi.com/, Mounting=SurfaceMount, Package URL=http://www.fairchildsemi.com/dwg/MA/MA03D.pdf, Packaging=Tape&Reel, Rad Hard=No, RDS-on=6000@10VmOhm, Typical Fall Time=2.4ns, Typical Rise Time=9ns, Typical Turn-Off Delay Time=17ns, Typical Turn-On Delay Time=1.7ns
R1: library part WSR21L000FEA, "Resistor", Manufacturer_Name=Vishay, Mouser Part Number=71-WSR21L000FEA, Arrow Part Number=WSR21L000FEA, Arrow Price/Stock=https://www.arrow.com/en/products/wsr21l000fea/vishay, Datasheet Link=https://componentsearchengine.com/Datasheets/1/WSR21L000FEA.pdf, Height=2.537mm, Manufacturer_Part_Number=WSR21L000FEA, Mouser Price/Stock=https://www.mouser.com/Search/Refine.aspx?Keyword=71-WSR21L000FEA
R2 R3 R4 R5 R6 R7 R8 R9 R10 R11 R12 R13 R14 R15 R16 R17 R18 R19: library part "RES semi", "Chip Resistor", Manufacturer=Yageo/Phycomp, Manufacturer P/N=RC0603FR-0749R9L, numsch=021, Parameters="49.9R, RC, 0.1W, ±1%, TCR ±100ppm", TypeNum=212
U2: library part CMP-0704-00003-2, "Zero-Drift, Bi-Directional Current / Power Monitor, 3 to 5.5 V, -40 to 125 degC, 8-pin SOIC (D8), Green (RoHS & no Sb/Br)", Manufacturer="Texas Instruments", Quiescent Current (+/-)(Typ)(mA)=0.7, Rating=Catalog, CMRR(Min)(dB)=100, Code_JEDEC=MS-012, Common Mode Range(Max)(V)=26, Common Mode Range(Min)(V)=0, ComponentLink1Description="Manufacturer URL", ComponentLink1URL=http://www.ti.com/, ComponentLink2Description=Datasheet, ComponentLink2URL=http://www.ti.com/general/docs/lit/getliterature.tsp?genericPartNumber=INA219&fileType=pdf, ComponentLink3Description="Package Specification", ComponentLink3URL=http://www.ti.com/lit/ml/msoi002j/msoi002j.pdf, DatasheetVersion=SBOS448F, Eco-Plan="Green (RoHS & no Sb/Br)", Gain(V/V)="1, 0.5, 0.25, 0.125", Input Offset (+/-)(Max)(uV)=100, Mounting Technology="Surface Mount", PackageDescription="8-Pin Plastic Small Outline, Body 4.9 x 3.9 mm, Pitch 1.27 mm", PackageReference=D0008A, PackageVersion="4040047-3/M, 06/2011", PartNumber=INA219AIDR, Small-Signal Bandwidth(Typ)(MHz)=0.011, SubFamily="Current Shunt Monitor", Vs(Max)(V)=5.5, Vs(Min)(V)=3
U3: library part CMP-0337-00092-2, "2.2 A, 2.7 to 5.5 V Single Hot-Swap IC Hi-Side MOSFET, Fault Report, Act-High Enable, 33 mOhms, -40 to 85 degC, 8-pin SOIC (D), Green (RoHS & no Sb/Br)", Continuous Current(Max)(A)=2, Current Limit(A)=3, Manufacturer="Texas Instruments", Rating=Catalog, Code_JEDEC=MS-012AA, ComponentLink1Description=Datasheet, ComponentLink1URL=http://www.ti.com/general/docs/lit/getliterature.tsp?genericPartNumber=TPS2034&fileType=pdf, DatasheetVersion=SLVS190C, Eco-Plan="Green (RoHS & no Sb/Br)", Enable="Active High", Mounting Technology="Surface Mount", Number of Switches=1, PackageDescription="8-Pin Plastic Small Outline Integrated Circuit, 4.9 x 3.9 mm, Pitch 1.27 mm Pitch", PackageReference=D0008A, PackageVersion="revM, Jun-2011", PartNumber=TPS2034D, rDS(on) per FET(Typ)(mOhms)=33, Vin(Max)(V)=5.5, Vin(Min)(V)=2.7
U4: library part CMP-06284-000006-1, "IC USB 2.0 2PORT HUB CTLR 36QFN", Ambient Temperature Range High=+85°C, Ambient Temperature Range Low=-40°C, Manufacturer="Microchip Technology", Max Supply Voltage=3.6V, Min Supply Voltage=3V, Package=0, Temperature="-40°C to +85°C", Automotive=No, Category=IC, ComponentLink2Description=Datasheet, ComponentLink2URL=http://ww1.microchip.com/downloads/en/DeviceDoc/00001692C.pdf, Device Class L1="Integrated Circuits (ICs)", Device Class L2="Interface ICs", Device Class L3="USB Interface ICs", Digikey Description="IC USB 2.0 2PORT HUB CTLR 36QFN", Height=1mm, Interface=I2C,USB,SMBus, Ipc Land Pattern Name=QFN50P600X600X90-36, Lead Free=Yes, Manufacturer Part Number=USB2512BI-AEZG, Mouser Description="USB Interface IC USB2.0 HIGH SPEED IND HUB CONTROLLER", Number of Ports=2, Octopart=https://octopart.com/usb2512bi-aezg-microchip-24995415, RoHS=TRUE, Standoff Height=0mm, Temperature Range High=+85°C, Temperature Range Low=-40°C, USB Standard="USB 2.0"
U5: library part CMP-07103-000004-1, "IC USB SWITCH DPDT 10MSOP", Case/Package=MSOP, Current=100mA, Max Operating Temperature=85°C, Max Supply Voltage=4.3V, Min Operating Temperature=-40°C, Min Supply Voltage=3V, On-State Resistance=6.5R, Package Quantity=1, Data Rate=480Mbps, Height=0.85mm, Lead Free="Lead Free", Length=3mm, Mount="Surface Mount", Number Of Channels=2, Number of Inputs=2, Number of Outputs=4, Number of Pins=10, Operating Supply Voltage=4.3V, Packaging="Tape and Reel", Radiation Hardening=No, REACH SVHC="No SVHC", Supply Type=Single, Throw Configuration=DPDT, Voltage=4.3V, Weight=0.1125g, Width=3mm
Y1: library part CMP-200220-000007-1, "CRYSTAL 16.0000MHZ 8PF SMD", Case/Package=SMD/SMT, ESR (Equivalent Series Resistance)=80R, Frequency=16MHz, Frequency Stability=30ppm, Frequency Tolerance=20ppm, Load Capacitance=8pF, Max Operating Temperature=85°C, Min Operating Temperature=-40°C, Package Quantity=3000, Height=0.035inch, Length=0.126inch, Mount="Surface Mount", Number of Pins=4, Packaging="Tape and Reel", Width=0.098inch

## Free pads (board coordinates)
  round 2.6 hole 2.4: ""(17.625,32.95) ""(41.375,26.025)

## Via types
v1: diameter 0.6, hole 0.4, Top Layer to Bottom Layer, tented both sides, 503 vias
v2: diameter 0.45, hole 0.25, Top Layer to Bottom Layer, 12 vias

## Nets (pads, with @x,y where several pads share a name; then routed paths per layer and width w, separated by ;. In a path a pad name is that pad's centre, name@x,y a point inside that pad or via, vN(x,y) a via of type N, cw(c..) or ccw(c..) an arc to the next point about the centre after c; other vN are vias at no path point)
+3.3V: C1.1 C3.1 C4.1 C18.1 C19.1 C20.1 C21.1 C22.1 C23.1 C24.2 IC1.5 R8.1 R12.2 U2.5 U4.5 U4.10 U4.15 U4.23 U4.27 U4.29 U4.36 U5.1 | length 147.5
  Top Layer w0.254: C18.1 11.375,29.525 11.698,29.848 12.398,29.848 13.5,30.95 U4.27 ; C19.1@11.375,35.667 11.375,35.475 11.698,35.152 11.89,35.152 12.013,35.029 14.092,32.95 U4.23 ; U4.15 C23.1 ; U4.36 22.6,30.2 23.175,29.625 C20.1 ; U4.10 C22.1 ; U4.5 21.625,32.95 22.15,33.475 C21.1
  Top Layer w0.3: C24.2 6.575,22.35 6.875,22.05 6.875,21.575 7.4,21.05 U5.1
  Top Layer w0.5: U2.5 111.755,20.545 C1.1@112.375,19.925
  Top Layer w0.6: C3.1 16.5,8.65 20.65,4.5 104.607,4.5 106,5.893 106,10.264 103.575,12.689 103.575,16.232 106.343,19 111.45,19 112.225,19.775 112.425,19.775 C1.1
+5V: C2.1 C9.1 C27.1 C29.1 IC1.1 IC1.3 L2.2 R18.1 U3.2 U3.3
+13.8: C26.1 F1.1 L1.1 P1.1 P3.1 P3.2 P4.1 Q1.4 | length 15.8
  Top Layer w1: P1.1 78.5,16.625 ; 95.825,14.525 97,13.35 P4.1@97,7.95
+13.8V_IN: C5.1 C6.1 C7.1 D1.1 F2.1 J2.1 J2.2 U1.8
  other v1: 105.964,37.821 106.964,37.821 107.964,37.821 108.964,37.821 109.964,37.821 110.964,37.821 111.964,37.821 112.964,37.821 113.964,37.821 114.964,37.821 115.964,37.821 116.964,37.821 117.964,37.821 118.964,37.821 119.964,37.821 120.964,37.821 121.964,37.821 122.964,37.821 123.964,37.821 124.964,37.821 125.964,37.821 126.964,37.821 127.964,37.821 104.464,38.821 105.464,38.821 106.464,38.821 107.464,38.821 108.464,38.821 109.464,38.821 110.464,38.821 111.464,38.821 112.464,38.821 113.464,38.821 114.464,38.821 115.464,38.821 116.464,38.821 117.464,38.821 118.464,38.821 119.464,38.821 120.464,38.821 121.464,38.821 122.464,38.821 123.464,38.821 124.464,38.821 125.464,38.821 126.464,38.821 127.464,38.821 128.464,38.821 103.964,39.821 104.964,39.821 105.964,39.821 106.964,39.821 107.964,39.821 108.964,39.821 109.964,39.821 110.964,39.821 111.964,39.821 112.964,39.821 113.964,39.821 114.964,39.821 115.964,39.821 116.964,39.821 117.964,39.821 118.964,39.821 119.964,39.821 120.964,39.821 121.964,39.821 122.964,39.821 123.964,39.821 124.964,39.821 125.964,39.821 126.964,39.821 127.964,39.821 104.464,40.821 106.464,40.821 107.464,40.821 108.464,40.821 109.464,40.821 110.464,40.821 111.464,40.821 112.464,40.821 113.464,40.821 114.464,40.821 115.464,40.821 116.464,40.821 117.464,40.821 118.464,40.821 119.464,40.821 120.464,40.821 121.464,40.821 122.464,40.821 123.464,40.821 124.464,40.821 125.464,40.821 126.464,40.821 127.464,40.821 128.464,40.821 106.964,41.821 107.964,41.821 108.964,41.821 112.964,41.821 113.964,41.821 114.964,41.821 115.964,41.821 116.964,41.821 117.964,41.821 118.964,41.821 119.964,41.821 120.964,41.821 121.964,41.821 122.964,41.821 123.964,41.821 124.964,41.821 125.964,41.821 126.964,41.821 127.964,41.821 107.464,42.821 108.464,42.821 113.464,42.821 114.464,42.821 115.464,42.821 116.464,42.821 117.464,42.821 118.464,42.821 119.464,42.821 120.464,42.821 121.464,42.821 122.464,42.821 123.464,42.821 124.464,42.821 125.464,42.821 126.464,42.821 127.464,42.821 128.464,42.821 106.964,43.821 107.964,43.821 108.964,43.821 112.964,43.821 113.964,43.821 114.964,43.821 115.964,43.821 116.964,43.821 117.964,43.821 118.964,43.821 119.964,43.821 120.964,43.821 121.964,43.821 122.964,43.821 123.964,43.821 124.964,43.821 125.964,43.821 126.964,43.821 127.964,43.821 104.464,44.821 105.464,44.821 106.464,44.821 107.464,44.821 108.464,44.821 109.464,44.821 110.464,44.821 111.464,44.821 112.464,44.821 113.464,44.821 114.464,44.821 115.464,44.821 116.464,44.821 117.464,44.821 118.464,44.821 119.464,44.821 120.464,44.821 121.464,44.821 122.464,44.821 123.464,44.821 124.464,44.821 125.464,44.821 126.464,44.821 127.464,44.821 128.464,44.821 114.964,45.821 115.964,45.821 116.964,45.821 117.964,45.821 118.964,45.821 119.964,45.821 120.964,45.821 121.964,45.821 122.964,45.821 123.964,45.821 124.964,45.821 125.964,45.821 126.964,45.821 127.964,45.821 115.464,46.821 116.464,46.821 117.464,46.821 118.464,46.821 119.464,46.821 120.464,46.821 121.464,46.821 122.464,46.821 123.464,46.821 124.464,46.821 125.464,46.821 126.464,46.821 127.464,46.821 128.464,46.821 114.964,47.821 115.964,47.821 116.964,47.821 117.964,47.821 118.964,47.821 119.964,47.821 120.964,47.821 121.964,47.821 122.964,47.821 123.964,47.821 124.964,47.821 125.964,47.821 126.964,47.821 127.964,47.821 115.464,48.821 116.464,48.821 117.464,48.821 118.464,48.821 119.464,48.821 120.464,48.821 121.464,48.821 122.464,48.821 123.464,48.821 124.464,48.821 125.464,48.821 126.464,48.821 127.464,48.821 128.464,48.821 115.964,49.821 116.964,49.821 117.964,49.821 118.964,49.821 119.964,49.821 120.964,49.821 121.964,49.821 122.964,49.821 123.964,49.821 124.964,49.821 125.964,49.821 126.964,49.821 127.964,49.821
CPU_PW_HOLD: D4.1 P1.5 Q2.1 R6.2 | length 28
  Top Layer w0.2: P1.5 86.5,9.1 87.35,9.95 94.75,9.95 95.375,9.325 v2(96.075,9.325) ; v2(97.925,9.925) 97.925,11.051 99.125,12.251 99.125,17.09 99.53,17.495 99.53,17.615 100.13,18.215 D4.1 100.125,18.34 Q2.1
  Bottom Layer w0.2: v2(96.075,9.325) 96.7,9.325 97.3,9.925 v2(97.925,9.925)
CPU_PW_ON: C8.1 D3.2 D6.1 P1.4 | length 41.5
  Top Layer w0.2: P1.4 84.5,9.825 85.025,10.35 94.925,10.35 95.3,9.975 v2(96.075,9.975) ; v2(98.45,10.35) 98.45,11.01 100.625,13.185 101.258,13.185 101.375,13.302 101.375,17.163 103.075,18.863 103.075,27.325 104.725,28.975 106.375,28.975 106.775,29.375 D3.2
  Bottom Layer w0.2: v2(96.075,9.975) 96.725,9.975 97.2,10.45 98.142,10.45 98.195,10.398 98.402,10.398 v2(98.45,10.35)
GND: C1.2 C2.2 C3.2 C4.2 C5.2 C6.2 C7.2 C8.2 C9.2 C10.2 C11.2 C12.2 C13.2 C14.2 C15.1 C16.1 C17.1 C18.2 C19.2 C20.2 C21.2 C22.2 C23.2 C24.1 C25.2 C26.2 C27.2 C28.2 C29.2 C30.2 C31.2 D1.2 D4.2 D6.2 D7.2 D10.2 D11.2 IC1.2 J1.2 J1.3 J1.4 J2.3 J2.4 J3.2 J4.2 J5.4 J6.4 J7.4 M1.1 M2.1 M3.1 M4.1 P1.2 P1.MP1 P1.MP2 P2.3 P2.4 P2.MP1 P2.MP2 P3.3 P3.4 P3.MP1 P3.MP2 P4.2 P4.MP1 P4.MP2 P5.3 P5.MP1 P5.MP2 P6.1 P6.MP1 P6.MP2 pad. Q2.2 R2.1 R3.1 R6.1 R7.1 R10.1 R11.1 R13.1 R14.1 R15.1 R17.1 R19.2 U1.7 U2.1 U2.2 U2.6 U3.1 U4.37 U5.5 U5.10 U6.4 U6.5 U6.8 U6.9 Y1.2 Y1.4 | length 22.3
  Top Layer w0.3: C24.1@6.4,24.25 6.575,24.25 6.875,24.55 6.875,24.9 7.425,25.45 U5.10
  Top Layer w1: J6.4 35.035,51.445 36.555,49.925 46.345,49.925 47.865,51.445 J5.4
  Bottom Layer w1.5: 15.575,47 15.6,47.025 15.6,50.121 16.479,51 J7.4
KEY_DASH: D9.2 P5.6 | length 25.4
  Top Layer w0.254: P5.6 v2(68.8,10.25)
  Top Layer w0.3: v2(66.425,20.35) 66.425,22.657 68.268,24.5 69.6,24.5 70.475,25.375 D9.2
  Bottom Layer w0.3: v2(66.425,20.35) 66.425,20.881 66.601,21.056 68.118,21.056 68.8,20.374 v2(68.8,10.25)
KEY_DOT: D8.2 P5.5 | length 25
  Top Layer w0.254: P5.5 v2(66.8,10.25)
  Top Layer w0.3: v2(67.125,20.35) 67.125,22.65 67.85,23.375 67.859,23.375 68.484,24 72.8,24 73.587,24.787 D8.2
  Bottom Layer w0.3: v2(66.8,10.25) 66.8,15.138 67.125,15.463 v2(67.125,20.35)
NetC15_2: C15.2 R9.2 U4.33 Y1.1 | length 7.6
  Top Layer w0.254: U4.33 18.125,28.725 18.825,28.025 R9.2 18.825,25.35 Y1.1 19.15,25.375 C15.2
NetC16_2: C16.2 R9.1 U4.32 Y1.3 | length 10
  Top Layer w0.254: C16.2 16.625,23.45 Y1.3 17.225,24.05 17.45,24.05 17.875,24.475 17.875,25.895 16.969,26.801 16.969,27.681 R9.1 16.925,28.025 17.625,28.725 U4.32
NetC17_2: C17.2 R12.1 U4.26 | length 7.6
  Top Layer w0.254: R12.1 7.875,32.45 10.575,32.45 11.375,31.65 C17.2 U4.26
NetC28_1: C28.1 C30.1 C31.1 L1.2 U6.1 U6.2 U6.6
NetD2_2: D2.2 Q1.1 Q2.3 R5.1 | length 9
  Top Layer w0.5: Q2.3 101.075,28.185 Q1.1 102.325,28.735 102.875,29.285 102.875,29.825 103.575,30.525 D2.2 R5.1
NetD5_1: D5.1 D7.1 J3.4 | length 11.1
  Top Layer w0.5: D5.1 76.874,31.062 80.276,31.062 D7.1 J3.4
NetD8_1: D8.1 D10.1 J4.5 | length 15.2
  Top Layer w0.5: D10.1 67.46,31.622 67.46,32.975 ; J4.5 67.46,32.975 ; D8.1 73.587,32.263 72.875,32.975 67.46,32.975
NetD9_1: D9.1 D11.1 J4.4 | length 18.1
  Top Layer w0.5: J4.4 62.46,31.278 62.721,31.017 62.721,29.829 63.325,29.225 69.975,29.225 70.475,29.725 D9.1
NetF1_2: F1.2 P2.1 P2.2
NetF2_2: F2.2 Q1.3 R4.2 R5.2 | length 5.3
  Top Layer w0.5: Q1.3 102.035,33.725 R5.2 R4.2
NetL2_1: L2.1 U6.7
NetP6_2: P6.2 R16.1 R17.2 U5.2 | length 21.7
  Top Layer w0.3: R16.1 R17.2 4.35,20.725 5.075,20 8.7,20 ; U5.2 8.7,14.925 9.2,14.425 P6.2
NetR2_2: R2.2 U1.5 | length 7.5
  Top Layer w0.254: U1.5 122.825,32.775 123.5,32.1 127.2,32.1 127.652,32.552 128.227,32.552 R2.2
NetR3_2: R3.2 U1.6 | length 4.2
  Top Layer w0.254: U1.6 123.675,32.724 123.824,32.575 125.728,32.575 125.73,32.577 126.177,32.577 R3.2
NetR10_2: R10.2 U4.35 | length 3.2
  Top Layer w0.254: U4.35 19.125,29.325 19.775,28.675 R10.2
NetR11_2: R11.2 U4.25 | length 4.2
  Top Layer w0.254: R11.2 12.2,33.55 13.8,31.95 U4.25
NetR13_2: R13.2 U4.24 | length 8
  Top Layer w0.254: R13.2 7.9,34.575 11.825,34.575 13.95,32.45 U4.24
NetR14_2: R14.2 U4.22 | length 9.1
  Top Layer w0.254: R14.2 12.1,36.825 12.6,36.325 12.6,35.173 14.31,33.463 14.862,33.463 U4.22
NetR15_2: R15.2 U4.28 | length 2.1
  Top Layer w0.254: R15.2 14.975,28.675 15.175,28.875 15.175,29.46 15.625,29.91 U4.28
NetR18_2: R18.2 R19.1 U6.3
PA_CUR_N: J1.1 R1.2 U2.7 | length 16.2
  Top Layer w0.2: U2.7@110.783,23.143 110.9,23.26 110.9,23.403 111.017,23.52 115.963,23.52 115.968,23.525 121.625,23.525 121.95,23.2 R1.2 ; v1@120.725,21.875 121.075,21.525
  other v1: 119.964,11.821 120.964,11.821 121.964,11.821 122.964,11.821 123.964,11.821 124.964,11.821 125.964,11.821 126.964,11.821 127.964,11.821 119.464,12.821 120.464,12.821 121.464,12.821 122.464,12.821 123.464,12.821 124.464,12.821 125.464,12.821 126.464,12.821 127.464,12.821 128.464,12.821 122.964,13.821 123.964,13.821 124.964,13.821 125.964,13.821 126.964,13.821 127.964,13.821 123.464,14.821 124.464,14.821 125.464,14.821 126.464,14.821 127.464,14.821 128.464,14.821 122.964,15.821 123.964,15.821 124.964,15.821 125.964,15.821 126.964,15.821 127.964,15.821 118.464,16.821 119.464,16.821 120.464,16.821 121.464,16.821 122.464,16.821 123.464,16.821 124.464,16.821 125.464,16.821 126.464,16.821 127.464,16.821 128.464,16.821 114.964,17.821 115.964,17.821 116.964,17.821 117.964,17.821 118.964,17.821 119.964,17.821 120.964,17.821 121.964,17.821 122.964,17.821 123.964,17.821 124.964,17.821 125.964,17.821 126.964,17.821 127.964,17.821 115.464,18.821 116.464,18.821 117.464,18.821 118.464,18.821 119.464,18.821 120.464,18.821 121.464,18.821 122.464,18.821 123.464,18.821 124.464,18.821 125.464,18.821 126.464,18.821 127.464,18.821 128.464,18.821 114.964,19.821 115.964,19.821 116.964,19.821 117.964,19.821 118.964,19.821 119.964,19.821 120.964,19.821 121.964,19.821 122.964,19.821 123.964,19.821 124.964,19.821 125.964,19.821 126.964,19.821 127.964,19.821 115.464,20.821 116.464,20.821 117.464,20.821 118.464,20.821 119.464,20.821 120.464,20.821 121.464,20.821 122.464,20.821 123.464,20.821 124.464,20.821 125.464,20.821 126.464,20.821 127.464,20.821 128.464,20.821 114.964,21.821 115.964,21.821 116.964,21.821 117.964,21.821 118.964,21.821 119.964,21.821 120.964,21.821 121.964,21.821 122.964,21.821 123.964,21.821 124.964,21.821 125.964,21.821 126.964,21.821 127.964,21.821
PA_CUR_P: R1.1 U1.1 U1.2 U1.3 U2.8 | length 16.6
  Top Layer w0.2: U2.8 110.725,24.355 110.9,24.18 110.9,24.037 111.017,23.92 115.798,23.92 115.802,23.925 121.625,23.925 121.95,24.25 R1.1 ; 120.725,25.575 121.075,25.925
  other v1: 112.964,24.821 113.964,24.821 114.964,24.821 115.964,24.821 116.964,24.821 117.964,24.821 118.964,24.821 119.964,24.821 120.964,24.821 121.964,24.821 122.964,24.821 123.964,24.821 124.964,24.821 125.964,24.821 126.964,24.821 127.964,24.821 113.464,25.821 114.464,25.821 115.464,25.821 116.464,25.821 117.464,25.821 118.464,25.821 119.464,25.821 120.464,25.821 121.464,25.821 122.464,25.821 123.464,25.821 124.464,25.821 125.464,25.821 126.464,25.821 127.464,25.821 128.464,25.821 112.964,26.821 113.964,26.821 114.964,26.821 115.964,26.821 116.964,26.821 117.964,26.821 118.964,26.821 119.964,26.821 120.964,26.821 121.964,26.821 122.964,26.821 123.964,26.821 124.964,26.821 125.964,26.821 126.964,26.821 127.964,26.821 113.464,27.821 114.464,27.821 115.464,27.821 116.464,27.821 117.464,27.821 118.464,27.821 119.464,27.821 120.464,27.821 121.464,27.821 122.464,27.821 123.464,27.821 124.464,27.821 125.464,27.821 126.464,27.821 127.464,27.821 128.464,27.821 112.964,28.821 113.964,28.821 114.964,28.821 115.964,28.821 116.964,28.821 117.964,28.821 118.964,28.821 119.964,28.821 120.964,28.821 121.964,28.821 122.964,28.821 123.964,28.821 124.964,28.821 125.964,28.821 126.964,28.821 127.964,28.821 113.464,29.821 114.464,29.821 115.464,29.821 116.464,29.821 117.464,29.821 118.464,29.821 119.464,29.821 120.464,29.821 121.464,29.821 122.464,29.821 123.464,29.821 124.464,29.821 125.464,29.821 126.464,29.821 127.464,29.821 128.464,29.821 112.964,30.821 113.964,30.821 114.964,30.821 115.964,30.821 116.964,30.821 117.964,30.821 118.964,30.821 119.964,30.821 120.964,30.821 121.964,30.821 122.964,30.821 123.964,30.821 124.964,30.821 125.964,30.821 126.964,30.821 127.964,30.821 113.464,31.821 114.464,31.821 115.464,31.821 116.464,31.821 117.464,31.821 118.464,31.821 119.464,31.821 120.464,31.821 121.464,31.821 112.964,32.821 113.964,32.821 114.964,32.821 115.964,32.821 116.964,32.821 117.964,32.821 118.964,32.821 119.964,32.821 120.964,32.821 113.464,33.821 114.464,33.821 115.464,33.821 116.464,33.821 117.464,33.821 118.464,33.821 119.464,33.821 120.464,33.821
PA_CURRENT_SCL: P4.3 P5.1 U2.4 | length 60.8
  Top Layer w0.2: P5.1 58.8,5.941 59.241,5.5 100.275,5.5 100.6,5.825 100.6,6.2 101,6.6 101,11.1 102.175,12.275 102.175,16.831 105.125,19.781 U2.4
PA_CURRENT_SDA: P4.4 P5.2 U2.3 | length 73
  Top Layer w0.2: P5.2 60.8,9.266 60.4,9.666 60.141,9.666 59.707,10.1 58.176,10.1 58,9.924 58,6.175 59.075,5.1 102.4,5.1 103,5.7 103,6.6 P4.4 103,11.85 102.575,12.275 102.575,16.666 106.5,20.591 106.5,21.55 106.225,21.825 105.135,21.825 U2.3
PA_POWER_ON: P4.5 U1.4 | length 45.2
  Top Layer w0.2: P4.5@105,7.95 105,10.416 102.975,12.441 102.975,16.5 106.9,20.425 106.9,25.525 108.05,26.675 108.05,34.6 108.95,35.5 121.7,35.5 121.942,35.258 121.942,34.105 U1.4
POWER_SW: D2.1 D3.1 P1.3 R4.1 | length 46.5
  Top Layer w0.2: P1.3 82.5,10.275 82.975,10.75 95.091,10.75 95.216,10.625 v2(96.075,10.625) ; v2(98.975,10.733) 99.023,10.781 99.023,11.017 100.791,12.785 101.424,12.785 101.775,13.136 101.775,16.997 103.475,18.697 103.475,26.875 103.975,27.375 D2.1 D3.1 106.775,28.5 107.625,29.35 107.625,31.275 107.075,31.825 R4.1
  Bottom Layer w0.2: v2(96.075,10.625) 96.7,10.625 96.95,10.875 98.766,10.875 98.907,10.733 v2(98.975,10.733)
PTT: D5.2 P5.4 | length 30.7
  Top Layer w0.254: P5.4 65.173,8.423 65.173,9.848 65.512,10.187 65.937,10.187 v2(65.975,10.225)
  Top Layer w0.3: v2(67.825,20.35) 67.825,22.634 68.691,23.5 75.775,23.5 76.7,24.425 D5.2
  Bottom Layer w0.3: v2(65.975,10.225) 65.975,9.825 66.2,9.6 67.025,9.6 67.825,10.4 v2(67.825,20.35)
SHIELD: C25.1 J5.7 J5.8 J6.7 J6.8 J7.5 J7.6
USB_HUB_EN: R7.2 U3.4 U4.12
USB_HUB_FAULT: R8.2 U3.5 U4.13 U4.17 | length 12
  Top Layer w0.254: R8.2 11.375,38.029 11.598,38.252 16.34,38.252 ; U4.17 16.125,38.037 16.34,38.252 ; U4.13 18.125,38.037 17.91,38.252 16.34,38.252
USB_N: P6.4 U5.4 | length 15.1
  Top Layer w0.2: U5.4 9.65,21 9.65,16.625 12.4,13.875 12.4,7.967 12.517,7.85 P6.4
USB_P: P6.3 U5.3 | length 15.1
  Top Layer w0.2: U5.3 9.25,21 9.25,16.459 12,13.709 12,7.967 11.883,7.85 P6.3
USB_VBUS: C10.1 C11.1 C12.1 C13.1 C14.1 D12.1 J5.1 J6.1 P6.5 U3.6 U3.7 U3.8
USBD_N: J7.2 U5.8 | length 42.5
  Top Layer w0.2: U5.8 9.15,25.5 9.15,27.3 8.2,28.25 5.05,28.25 4.6,28.7 4.6,39.284 5.966,40.65 18.175,40.65 19.1,41.575 19.1,49.575 19.255,49.73 19.42,49.73 J7.2
USBD_P: J7.3 U5.9 | length 43.2
  Top Layer w0.2: U5.9 8.75,25.5 8.75,27.134 8.034,27.85 4.884,27.85 4.2,28.534 4.2,39.45 5.8,41.05 18.009,41.05 18.7,41.741 18.7,49.741 19.089,50.13 19.28,50.13 J7.3
USBD_VBUS: D12.2 J7.1 R16.2 | length 38.8
  Top Layer w0.7: R16.2 2.325,25.65
  Top Layer w1: 2.325,25.65 2.325,42.35 3.65,43.675 D12.2 16.775,46.075 17.65,46.95 J7.1
USBH1_N: J5.2 U4.1 | length 42.9
  Top Layer w0.2: U4.1 20.415,30.99 20.805,30.99 20.815,31 25.491,31 26.825,32.334 26.825,38.659 27.566,39.4 40.666,39.4 41.675,40.409 41.675,47.45 42.47,48.245 47.15,48.245 J5.2
USBH1_P: J5.3 U4.2 | length 42.9
  Top Layer w0.2: U4.2 20.415,31.41 20.805,31.41 20.815,31.4 25.325,31.4 26.425,32.5 26.425,38.825 27.4,39.8 40.5,39.8 41.275,40.575 41.275,47.616 42.304,48.645 47.15,48.645 J5.3
USBH2_N: J6.2 U4.3 | length 28.4
  Top Layer w0.2: U4.3 20.415,31.99 20.805,31.99 20.815,32 24.925,32 25.7,32.775 25.7,44.259 29.686,48.245 34.15,48.245 J6.2
USBH2_P: J6.3 U4.4 | length 28.4
  Top Layer w0.2: U4.4 20.415,32.41 20.805,32.41 20.815,32.4 24.759,32.4 25.3,32.941 25.3,44.425 29.52,48.645 34.15,48.645 J6.3
USBH_N: U4.30 U5.6 | length 13.4
  Top Layer w0.2: U5.6 10.15,25.4 10.15,24.025 10.475,23.7 12.359,23.7 12.75,24.091 12.75,27.266 13.409,27.925 15.45,27.925 15.875,28.35 15.875,28.665 16.285,29.075 16.514,29.075 16.675,29.236 16.675,29.76 16.665,29.77 16.665,30.16 U4.30
USBH_P: U4.31 U5.7 | length 14.8
  Top Layer w0.2: U5.7 9.75,25.4 9.75,24.75 9.75,23.859 10.309,23.3 12.525,23.3 13.15,23.925 13.15,27.1 13.575,27.525 15.616,27.525 16.275,28.184 16.275,28.499 16.451,28.675 16.68,28.675 17.075,29.07 17.075,29.76 17.085,29.77 17.085,30.16 U4.31